# Altium PCB MainBoard_Model_Ra.PcbDoc
Units mil, origin at the board's own origin, x right, y up, seen from the top; angles counter-clockwise.
Board outline 3105 x 1505 mil, 2 copper layers (Top Layer, Bottom Layer); 45 components, 29 nets, 199 pads, 26 vias.
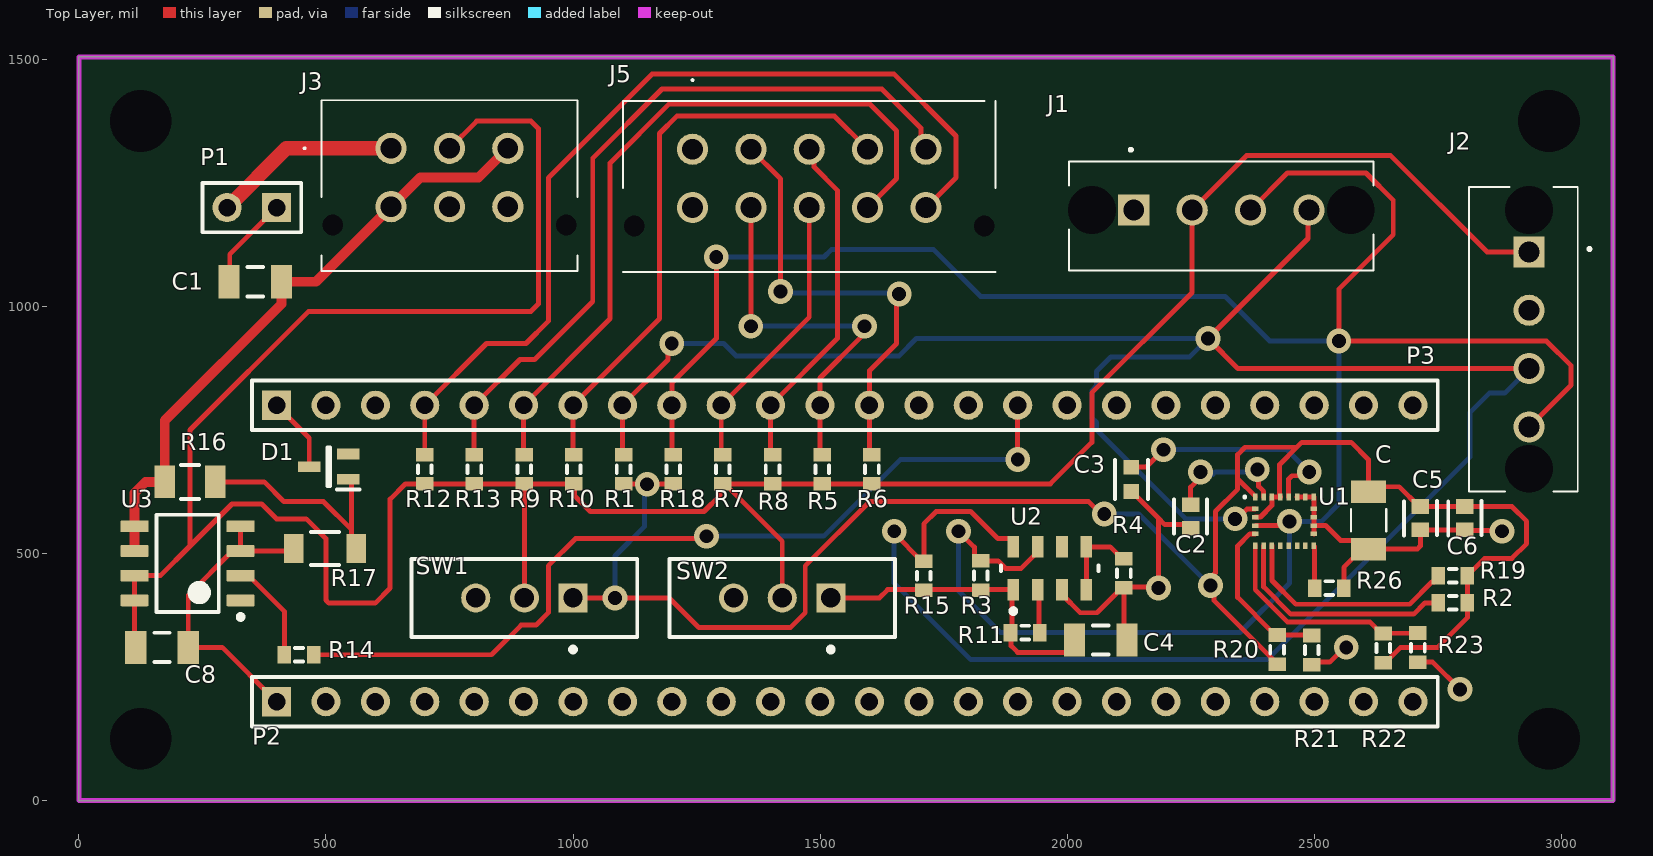
[diagram p0: Top Layer view]
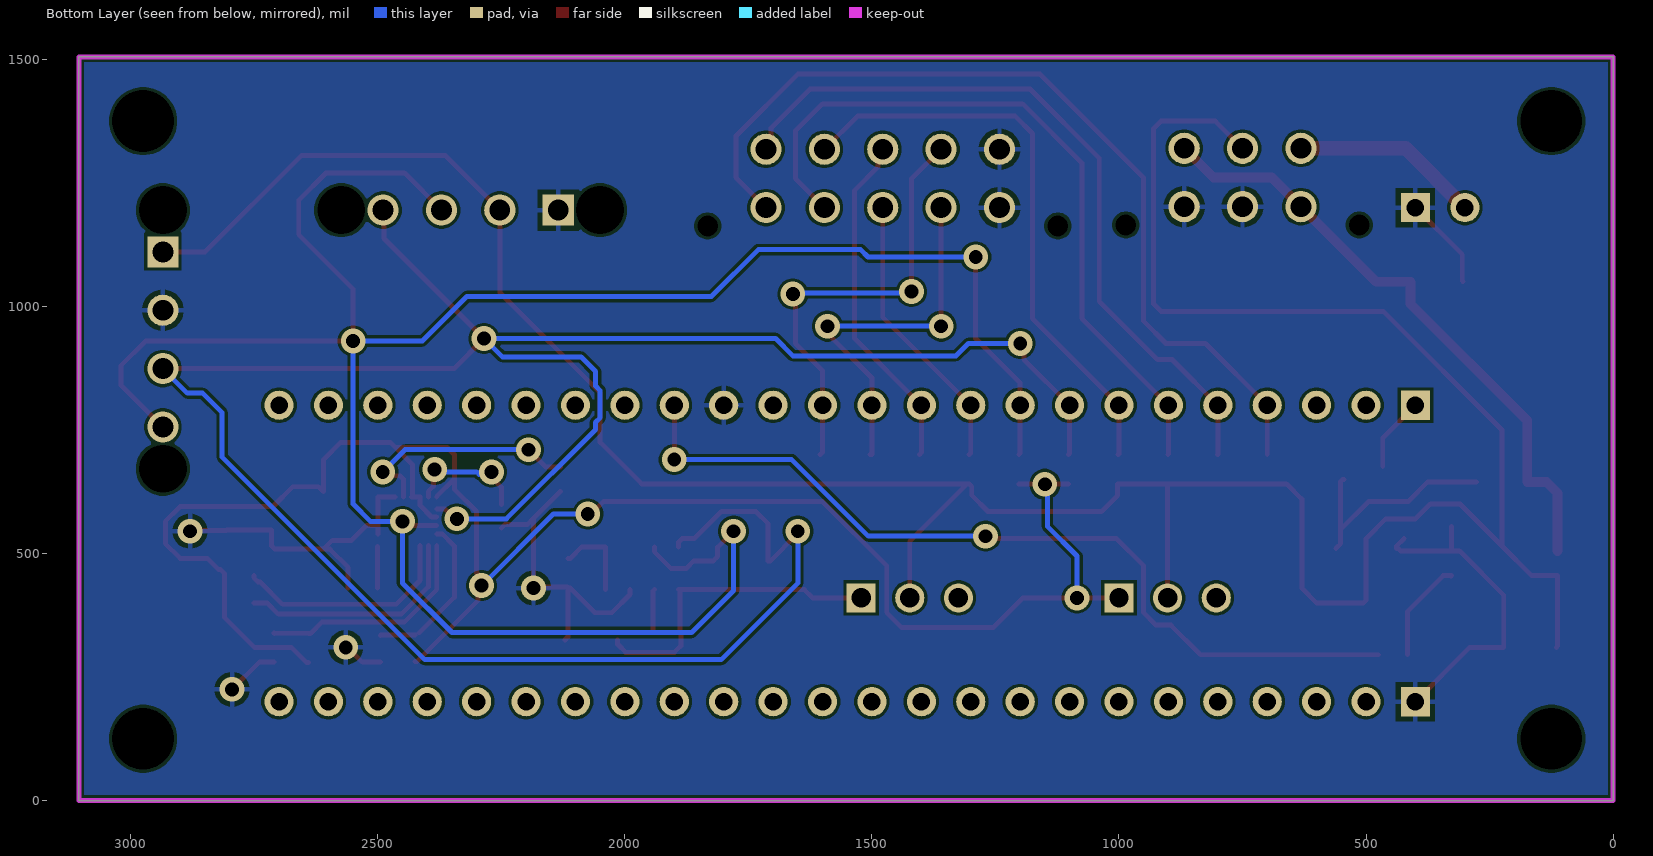
[diagram p1: Bottom Layer view, seen from below]

## Layer stack, top to bottom
Top Solder: solder mask 0.4, Solder Resist, Dk 3.5
Top Layer: signal copper 1.4
Dielectric 1: dielectric 12.6, FR-4, Dk 4.8
Bottom Layer: signal copper 1.4
Bottom Solder: solder mask 0.4, Solder Resist, Dk 3.5

## Board outline
0,0 3105,0 3105,1505 0,1505

## Design rules (kind name [scope] priority, off if disabled: settings)
Clearance [All] p1: gap=6 ignorepadtopadclearanceinfootprint=TRUE except(0: Arc-Hole Track-Hole SMDPad-Hole THPad-Hole Via-Hole Fill-Hole Poly-Hole Region-Hole Text-Hole; 10: Arc-Text Track-Text SMDPad-Text THPad-Text Via-Text Fill-Text Poly-Text Region-Text Text-Text)
PolygonConnect [All] p1: connectstyle=Relief reliefconductorwidth=10 reliefentries=4 polygonreliefangle="90 Angle" airgapwidth=10
RoutingVias [All] p1: holewidth=28 width=50 viastyle="Through Hole" minholewidth=28 minwidth=50 maxholewidth=28 maxwidth=50
SolderMaskExpansion [All] p1: expansion=4 istentingtop=FALSE
Width Vufil [InNet('Vufil')] p1: maxlimit=20 minlimit=15 preferedwidth=20
Width Vbat [InNet('Vbat')] p2: maxlimit=30 minlimit=20 preferedwidth=30
Width [All] p3: maxlimit=10 minlimit=10 preferedwidth=10
30 further rules are at their usual default settings.

## Components (designator, comment, footprint, x,y, rotation, side; value= is the part's Value field where it differs from the comment)
C "10uF" CAPC3216X110N 2610,566.93 r270 top
C1 "Cap Semi" C1206 356.85,1050 r0 top value=0.1uF
C2 "0.1uF" FP-C0603C-CF-MFG 2250,575 r270 top value="0.10 μF"
C3 "10nF" FP-CL10-IPC_C 2130,650 r270 top
C4 "Cap Semi" C1206 2068.15,325 r0 top value=0.1uF
C5 "0.1uF" FP-C0603C-CF-MFG 2715,571.38 r270 top value="0.10 μF"
C6 "0.1uF" FP-C0603C-CF-MFG 2805,571.38 r270 top value="0.10 μF"
C8 "Cap Semi" C1206 168.15,310 r180 top value=10uF
D1 "MMBD330T1G" SOT65P220X100-3N 505.63,675.59 r180 top
J1 "0436500418" 0436500418 2135,1195 r180 top
J2 "0436500418" 0436500418 2935,1110.35 r90 top
J3 "0430450614" 0430450614 631.89,1320 r180 top
J5 "0430451013" 0430451013 1241.89,1318.11 r180 top
P1 "Header 2" HDR1X2 400,1200 r180 top
P2 "Header 24" HDR1X24 400,200 r0 top
P3 "Header 24" HDR1X24 400,800 r0 top locked
R1 "Res3" J1-0603 1102.22,670.47 r270 top value=10K
R2 "Res3" J1-0603 2780.47,400 r180 top value=10K
R3 "Res3" J1-0603 1825,455.47 r270 top value=10K
R4 "Res3" J1-0603 2115,460 r90 top value=10K
R5 "Res3" J1-0603 1504.44,670.47 r270 top value=10K
R6 "Res3" J1-0603 1605,670.47 r270 top value=10K
R7 "Res3" J1-0603 1303.33,670.47 r270 top value=10K
R8 "Res3" J1-0603 1403.89,670.47 r270 top value=10K
R9 "Res3" J1-0603 901.11,670.47 r90 top value=10K
R10 "Res3" J1-0603 1001.67,670.47 r90 top value=10K
R11 "Res3" J1-0603 1915,340 r0 top value=10K
R12 "Res3" J1-0603 700,670.47 r90 top value=10K
R13 "Res3" J1-0603 800.56,670.47 r90 top value=10K
R14 "Res3" J1-0603 445.47,295 r180 top value=250K
R15 "Res3" J1-0603 1710,455 r90 top value=10K
R16 "1KR" FP-ESR18-IPC_C 225,645 r180 top
R17 "1.5KR" FP-RT1206-MFG 497.99,510 r180 top value=1.5KΩ
R18 "Res3" J1-0603 1202.78,670.47 r90 top value=10K
R19 "Res3" J1-0603 2780.47,455 r180 top value=10K
R20 "Res3" J1-0603 2425,305.47 r90 top value=10K
R21 "Res3" J1-0603 2495,304.53 r90 top value=10K
R22 "Res3" J1-0603 2640,308.58 r90 top value=10K
R23 "Res3" J1-0603 2710,309.53 r90 top value=10K
R26 "Res3" J1-0603 2530.47,430 r180 top value=10K
SW1 "EG1218" ESWI-EG1218_V 901.57,410 r180 top
SW2 "EG1218" ESWI-EG1218_V 1423.43,410 r180 top
U1 "LSM9DS1TR" STM-LGA-24_3500X3000X1000 2440,565 r0 top
U2 "MS561101BA03-50" MSI-MS561101BA03-50-8_V 1965,470 r90 top
U3 "TPS76633DR" D0008A_N 220,480 r180 top

## Footprints (in the part's own frame and the unit in brackets; to place one, negate y for a bottom-side part, rotate by r counter-clockwise, add the part's x,y. Pads: shape width x height; smd on the part's side, far side on the other; paste and mask are expansions set on the pad)
0430450614 [mm]
  round 1.605 hole 1.07: 1(0,0) 2(-3,0) 3(-6,0) 4(0,3) 5(-3,3) 6(-6,3)
  round 0.535 hole 1.07 unplated: MH1(3,3.94) MH2(-9,3.94)
  silkscreen extent -9.57,-2.47 4.5,6.3, body extent -9.57,-2.47 3.57,6.3, height 10.26
0430451013 [mm]
  round 1.605 hole 1.07: 1(0,0) 2(-3,0) 3(-6,0) 4(-9,0) 5(-12,0) 6(0,3) 7(-3,3) 8(-6,3) 9(-9,3) 10(-12,3)
  round 0.535 hole 1.07 unplated: MH1(-15,3.94) MH2(3,3.94)
  silkscreen extent -15.58,-3.6 3.57,6.3, body extent -15.58,-2.47 3.57,6.3, height 10.26
0436500418 [mm]
  rect 1.605x1.605 hole 1.07: 1(0,0)
  round 1.605 hole 1.07: 2(-3,0) 3(-6,0) 4(-9,0)
  round 1.23 hole 2.46 unplated: 5(2.15,0) 6(-11.15,0)
  silkscreen extent -12.32,-3.15 3.32,3.1, body extent -12.32,-2.47 3.32,3.1, height 10
C1206 [mm] "Chip Capacitor, Body 3.2x1.6mm, IPC High Density"
  rect 1.1x1.7 smd: 1(-1.35,0) 2(1.35,0)
  silkscreen extent -0.4,-0.75 0.4,0.75, body extent -1.7,-0.9 1.7,0.9, height 1.3
CAPC3216X110N [mm]
  rect 1.16x1.82 smd: 1(-1.475,0) 2(1.475,0)
  silkscreen extent -0.57,-0.9 0.57,0.9
D0008A_N [mm] "SOIC, 8-Leads, Body 5x4mm, Pitch 1.27mm, IPC Medium Density"
  rrect17% 1.45x0.6 smd: 1(-2.725,1.905) 2(-2.725,0.635) 3(-2.725,-0.635) 4(-2.725,-1.905) 5(2.725,-1.905) 6(2.725,-0.635) 7(2.725,0.635) 8(2.725,1.905)
  silkscreen extent -2.85,-2.5 1.6,2.88, body extent -3,-2.45 3,2.45, height 1.63
ESWI-EG1218_V [mm] "THD, 3-Leads, Body 11.6x4mm, Pitch 2.5mm"
  rect 1.5x1.5 hole 1: 1(-2.5,0)
  round 1.5 hole 1: 2(0,0) 3(2.5,0)
  silkscreen extent -5.8,-2 5.8,2.77, body extent -5.8,-2 5.8,2, height 7.4
FP-C0603C-CF-MFG [mm]
  rect 0.75x0.9 smd paste+0 mask+0: 1(-0.6,0) 2(0.6,0)
  silkscreen extent -0.87,-0.85 0.88,0.85, body extent -1.2,-0.6 1.2,0.6, height 0.25
FP-CL10-IPC_C [mil]
  rect 29.85x31.97 smd paste+0 mask+0: 1(-24.68,0) 2(24.68,0)
  silkscreen extent -40,-33 40,33, body extent -44,-22 44,22, height 10
FP-ESR18-IPC_C [mil]
  rect 41.56x65.28 smd paste+0 mask+0: 1(-51.23,0) 2(51.23,0)
  silkscreen extent -19,-34 19,34, body extent -76,-38 76,38, height 10
FP-RT1206-MFG [mm]
  rect 1x1.5 smd paste+0 mask+0: 1(-1.6,0) 2(1.6,0)
  silkscreen extent -0.72,-0.85 0.72,0.85, body extent -2.2,-0.95 2.2,0.95, height 0.25
HDR1X2 [mm] "Connector; Header; 2 Position"
  rect 1.5x1.5 hole 0.9: 1(0,0)
  round 1.5 hole 0.9: 2(2.54,0)
  silkscreen extent -1.27,-1.27 3.81,1.27
HDR1X24 [mm] "Connector; Header; 24 Position"
  rect 1.5x1.5 hole 0.9: 1(0,0)
  round 1.5 hole 0.9: 2(2.54,0) 3(5.08,0) 4(7.62,0) 5(10.16,0) 6(12.7,0) 7(15.24,0) 8(17.78,0) 9(20.32,0) 10(22.86,0) 11(25.4,0) 12(27.94,0) 13(30.48,0) 14(33.02,0) 15(35.56,0) 16(38.1,0) 17(40.64,0) 18(43.18,0) 19(45.72,0) 20(48.26,0) 21(50.8,0) 22(53.34,0) 23(55.88,0) 24(58.42,0)
  silkscreen extent -1.27,-1.27 59.69,1.27
J1-0603 [mm] "Chip Resistor, Body 1.6x0.8mm, IPC High Density"
  rect 0.7x0.9 smd: 1(-0.75,0) 2(0.75,0)
  silkscreen extent -0.2,-0.35 0.2,0.35, body extent -0.85,-0.48 0.85,0.48, height 0.9
MSI-MS561101BA03-50-8_V [mm] "SMD, 8-Leads, Body 5x3mm, Pitch 1.25mm"
  rect 1.1x0.6 smd: 1(-1.1,1.875) 2(-1.1,0.625) 3(-1.1,-0.625) 4(-1.1,-1.875) 5(1.1,-1.875) 6(1.1,-0.625) 7(1.1,0.625) 8(1.1,1.875)
  silkscreen extent -2.32,-2.5 0.15,2.5, body extent -1.5,-2.5 1.5,2.5, height 1
SOT65P220X100-3N [mm]
  rect 1.15x0.55 smd: 1(-1,0.65) 2(-1,-0.65) 3(1,0)
  silkscreen extent -1.58,-1 0.08,1.17, body extent -1.1,-1 1.1,1, height 1
STM-LGA-24_3500X3000X1000 [mm] "LGA, 24-Leads, Body 3.65x3.15mm, Pitch 0.43mm"
  rect 0.23x0.35 smd mask+0.05: 1(-1.505,1.25) 6(-1.505,-1.25) 7(-1.075,-1.25) 8(-0.645,-1.25) 9(-0.215,-1.25) 10(0.215,-1.25) 11(0.645,-1.25) 12(1.075,-1.25) 13(1.505,-1.25) 18(1.505,1.25) 19(1.075,1.25) 20(0.645,1.25) 21(0.215,1.25) 22(-0.215,1.25) 23(-0.645,1.25) 24(-1.075,1.25)
  rect 0.35x0.23 smd mask+0.05: 2(-1.505,0.645) 3(-1.505,0.215) 4(-1.505,-0.215) 5(-1.505,-0.645) 14(1.505,-0.645) 15(1.505,-0.215) 16(1.505,0.215) 17(1.505,0.645)
  silkscreen extent -2.11,1.19 -1.98,1.31, body extent -1.82,-1.57 1.83,1.58, height 1.03

## Part data
C: library part C1206C106K4PACTU, "10ÂµF Â±10% 16V Ceramic Capacitor X5R 1206 _3216 Metric_", Package="1206 KEMET", Digi-Key_Part_Number=399-5091-1-ND, Digi-Key_Purchase_URL=https://www.digikey.com/product-detail/en/kemet/C1206C106K4PACTU/399-5091-1-ND/1465625?utm_source=snapeda&utm_medium=aggregator&utm_campaign=symbol, MF=KEMET, MP=C1206C106K4PACTU, SnapEDA_Link=https://www.snapeda.com/parts/C1206C106K4PACTU/KEMET/view-part/609620/?ref=snap
C1 C4 C8: "Capacitor (Semiconductor SIM Model)", LatestRevisionDate=29-May-2009, LatestRevisionNote="IPC-7351 Footprint Added.", PackageDescription="Chip Capacitor", PackageReference=C1206, Published=8-Jun-2000, Publisher="Altium Limited"
C2 C5 C6: library part CMP-2006-03068-2, "CAP CER 0.1UF 50V 20% X7R 0603", Capacitance="0.10 μF", Manufacturer=KEMET, Manufacturer Part Number=C0603C104M5RACTU, Package=C0603C-CF, Temperature="-55°C to +125°C", Temperature Characteristic=X7R, Temperature Coefficient=30ppm/°C, Temperature Range High=+125°C, Temperature Range Low=-55°C, Tolerance=0.2, Voltage Rating="50 V", Automotive=Yes, Automotive Grade="Grade 1", Category=Cap, ComponentLink2Description=Datasheet, ComponentLink2URL=https://api.kemet.com/component-edge/download/datasheet/C0603C100J5GACAUTO.pdf, Device Class L1="Passive Components", Device Class L2=Capacitors, Device Class L3="Ceramic Capacitors", Digikey Description="CAP CER 0.1UF 50V 20% X7R 0603", Height=0.87mm, Lead Free=Yes, Material=Ceramic, Mouser Description="Multilayer Ceramic Capacitors MLCC - SMD/SMT 50volts 0.1uF X7R 20%", Octopart=https://octopart.com/c0603c104m5ractu-kemet-11855687, RoHS=TRUE
C3: library part CMP-13271-000724-1, "Cap Ceramic 10nF 25V X7R ±10% Pad SMD 0603 +125°C T/R", Case Code (Imperial)=0603, Case Code (Metric)=1608, Max Operating Temperature=125°C, Min Operating Temperature=-55°C, Ratings=AEC-Q200, Tolerance=10%, Voltage Rating=25V, Capacitance=10nF, Case/Package=0603, Features="Soft Termination", Length=0.063inch, Mount="Surface Mount", Packaging="Tape and Reel", Thickness=0.035inch, Width=0.031inch
D1: "Diode", Manufacturer_Name="ON Semiconductor", Mouser Part Number=863-MMBD330T1G, Arrow Part Number=MMBD330T1G, Arrow Price/Stock=https://www.arrow.com/en/products/mmbd330t1g/on-semiconductor, Datasheet Link=http://www.onsemi.com/pub/Collateral/MMBD330T1-D.PDF, Height=1mm, Manufacturer_Part_Number=MMBD330T1G, Mouser Price/Stock=https://www.mouser.com/Search/Refine.aspx?Keyword=863-MMBD330T1G
J1 J2 J3: "Connector", Manufacturer_Name=Molex
  J1 J2: Arrow Part Number=0436500418, Arrow Price/Stock=https://www.arrow.com/en/products/0436500418/molex, Datasheet Link=https://www.molex.com/pdm_docs/sd/436500418_sd.pdf, Height=9.9mm, Manufacturer_Part_Number=0436500418
  J3: Arrow Part Number=0430450614, Arrow Price/Stock=https://www.arrow.com/en/products/0430450614/molex, Datasheet Link=https://www.molex.com/pdm_docs/sd/430450614_sd.pdf, Height=10.16mm, Manufacturer_Part_Number=0430450614
J5: "Connector", Manufacturer_Name=Molex, Mouser Part Number=N/A, Datasheet Link=https://media.digikey.com/pdf/Data%20Sheets/Molex%20PDFs/PK-70873-05xx_1_N3.pdf, Height=10.16mm, Manufacturer_Part_Number=0430451013, Mouser Price/Stock=https://www.mouser.co.uk/ProductDetail/Molex/0430451013?qs=PBcRNPEHKsr61YxZQctt5w%3D%3D
P1: "Header, 2-Pin", LatestRevisionDate=17-Jul-2002, LatestRevisionNote="Re-released for DXP Platform.", Publisher="Altium Limited"
P2 P3: "Header, 24-Pin", LatestRevisionDate=17-Jul-2002, LatestRevisionNote="Re-released for DXP Platform.", Publisher="Altium Limited"
R1 R2 R3 R4 R5 R6 R7 R8 R9 R10 R11 R12 R13 R14 R15 R18 R19 R20 R21 R22 R23 R26: "Resistor", LatestRevisionDate=29-May-2009, LatestRevisionNote="IPC-7351 Footprint Added.", PackageDescription="Chip Resistor", PackageReference=J1-0603, Published=8-Jun-2000, Publisher="Altium Limited"
R16: library part CMP-08839-005364-1, "1kΩ ±1% 0.5W 1206 Anti-Surge Chip Resistor AEC-Q200", Case Code (Imperial)=1206, Case Code (Metric)=3216, Max Operating Temperature=155°C, Max Power Dissipation=333mW, Min Operating Temperature=-55°C, Package Quantity=1, Resistance=1kR, Resistor Type="Thick Film", Temperature Coefficient=100ppm/°C, Tolerance=1%, Case/Package=1206, Features="Automotive AEC-Q200", Height=0.026inch, Length=0.126inch, Number of Terminations=2, Packaging="Tape and Reel", RoHS Compliant=Yes, Series=ESR, Width=0.063inch
R17: library part CMP-2003-04305-2, "RES SMD 1.5K OHM 1% 1/4W 1206", Manufacturer=Yageo, Manufacturer Part Number=RT1206FRE071K5L, Package=RT1206, Power Rating=0.25W, Resistance=1.5KΩ, Temperature="-55°C to +155°C", Temperature Coefficient="50 ppm/°C", Temperature Range High=+155°C, Temperature Range Low=-55°C, Tolerance=0.0002, Voltage Rating=200V, Automotive=No, Category=Res, ComponentLink2Description=Datasheet, ComponentLink2URL=http://www.yageo.com/documents/recent/PYu-RT_1-to-0.01_RoHS_L_9.pdf, Composition="Thin Film", Device Class L1="Passive Components", Device Class L2=Resistors, Device Class L3="Chip SMD Resistors", Digikey Description="RES SMD 1.5K OHM 1% 1/4W 1206", Footprint Url=http://www.yageo.com/exep/pages/download/literatures/PYu-R_Mount_10.pdf, Height=0.65mm, Ipc Land Pattern Name=RESC310160X55, Lead Free=Yes, Mouser Description="High Precision-High Stability Chip Resistor Thin Film 1206 1.5kOhm 1% Paper T/R", Octopart=https://octopart.com/rt1206fre071k5l-yageo-1240277, RoHS=TRUE, Series=RT
SW1 SW2: library part CMP-1696-00002-1, "Slide Switch, 500 V, -20 to 70 degC, 3-Pin THD, RoHS", Case\Package=SOT-23-5, Dropout Voltage="300 mV", Max Input Voltage="8 V", Max Operating Temperature="85 degC", Max Ouput Current="150 mA", Max Power Dissipation="250 mW", Min Input Voltage="4.3 V", Min Operating Temperature="-40 degC", Nominal Output Voltage="3.3 V", Package Quantity=3000, ComponentLink1Description="Manufacturer URL", ComponentLink1URL=http://www.e-switch.ch/en/, ComponentLink2Description=Datasheet, ComponentLink2URL=https://www.e-switch.com/system/asset/product_line/data_sheet/119/EG.pdf, DatasheetVersion=Oct-15, Height="1.3 mm", Length="3 mm", Mount="Surface Mount", Output Current="150 mA", Output Voltage="3.3 V", Outputs=1, PackageDescription="3-Pin Through Hole Device, Body 11.6 x 4 mm, Pitch 2.5 mm", PackageReference=EG1218, Packaging="Tape and Reel", Pins=5, Power Rating="250 mW", Radiation Hardening=No, REACH SVHC="No SVHC", RoHSCompliant=true, Width="1.8 mm"
U1: library part CMP-2000-06606-1, "iNEMO Inertial Module: 3D Accelerometer, 3D Gyroscope, 3D Magnetometer, 1.9 to 3.6 V, -40 to 85 degC, 24-Pin LGA, RoHS, Tape and Reel", Manufacturer=STMicroelectronics, Package Description="24-Pin Plastic Land Grid Array Package, Body 3.65 x 3.15 mm, Pitch 0.43 mm", Package Reference=LGA-24_3500X3000X1000, PartNumber=LSM9DS1, Sensor Case Style=LGA, Supply Voltage Max=3.6V, Supply Voltage Min=1.9V, Acceleration Range=±2g,±4g,±8g,±16g, Datasheet URL=http://www2.st.com/content/ccc/resource/technical/document/datasheet/1e/3f/2a/d6/25/eb/48/46/DM00103319.pdf/files/DM00103319.pdf/jcr:content/translations/en.DM00103319.pdf, Datasheet Version="Rev. 3, 03/2015", Gyroscope Range=±245°/s,±500°/s,±2000°/s, Manufacturer URL=http://www.st.com/, MEMS Module Function=Tri-AxisGyroscope,Tri-AxisAccelerometer,Tri-AxisMagnetometer, Mounting Technology=SurfaceMount, MSL=MSL3-168hours, No. of Pins=24Pins, Packaging=CutTape, Product Range=-, SVHC=NoSVHC(17-Dec-2015)
U2: library part CMP-2000-05251-1, "Barometric Pressure Sensor, with Stainless Steel Cap, 1.8 to 3.6 V, -45 to 85 degC, 8-Pin QFN, RoHS, Tape and Reel", Manufacturer="Measurement Specialties", Operating Pressure Max=1200mbar, Operating Pressure Min=10mbar, Operating Temperature Max=85degC, Operating Temperature Min=-40degC, Package Description="8-Pin Surface Mount Device, Body 5 x 3 mm, Pitch 1.25 mm", Package Reference=MS561101BA03-50-8, Sensor Case Style=QFN, Supply Current=12.5µA, Supply Voltage Max=3.6V, Supply Voltage Min=1.8V, Connection Size=0.5mm, Datasheet URL=http://www.te.com/commerce/DocumentDelivery/DDEController?Action=srchrtrv&DocNm=MS5611-01BA03&DocType=Data+Sheet&DocLang=English&DocFormat=pdf&PartCntxt=CAT-BLPS0036, Datasheet Version=Sep-15, Manufacturer URL=http://www.meas-spec.com/, No. of Pins=8, Pressure Type=Barometric, SVHC=NoSVHC(20-Jun-2013)
U3: library part CMP-0394-00013-2, "Single Output LDO, 250 mA, Fixed 3.3 V Output, 2.7 to 10 V Input, with Low IQ, 8-pin SOIC (D), -40 to 125 degC, Green (RoHS & no Sb/Br)", Manufacturer="Texas Instruments", Power Good=TRUE, Code_JEDEC=MS-012, ComponentLink1Description="Manufacturer URL", ComponentLink1URL=http://www.ti.com/, ComponentLink2Description=Datasheet, ComponentLink2URL=http://www.ti.com/general/docs/lit/getliterature.tsp?genericPartNumber=TPS76633&fileType=pdf, ComponentLink3Description="Package Specification", ComponentLink3URL=http://www.ti.com/litv/pdf/msoi002j, DatasheetVersion=SLVS237C, Eco-Plan="Green (RoHS & no Sb/Br)", Fixed Output Options(V)=3.3, Iout(Max)(A)=0.25, Iq(Typ)(mA)=0.03, Mounting Technology="Surface Mount", PackageDescription="8-Pin Plastic Small Outline, Body 4.9 x 3.9 mm, Pitch 1.27 mm", PackageReference=D0008A, PackageVersion=4040047-3/M, PartNumber=TPS76633DR, SubFamily="Single Channel LDO", Vdo(Typ)(mV)=230, Vin(Max)(V)=10, Vin(Min)(V)=2.7, Vout Adj(Max)(V)=3.3, Vout Adj(Min)(V)=3.3

## Free pads (board coordinates)
  round 60 hole 125: ""(125,125) ""(125,1375) ""(2975,125) ""(2975,1375)

## Via types
v1: diameter 50, hole 28, Top Layer to Bottom Layer, 26 vias

## Nets (pads, with @x,y where several pads share a name; then routed paths per layer and width w, separated by ;. In a path a pad name is that pad's centre, name@x,y a point inside that pad or via, vN(x,y) a via of type N, cw(c..) or ccw(c..) an arc to the next point about the centre after c; other vN are vias at no path point)
A0: J5.2 P3.13 R6.1 | length 907
  Top Layer w10: J5.2 1420,1258.11 v1(1420,1030) ; R6.1 1600,705 P3.13 1600,870 1655,925 1655,1020 v1(1660,1025)
  Bottom Layer w10: v1(1420,1030) 1422.5,1027.5 1657.5,1027.5 v1(1660,1025)
A1: J5.7 P3.12 R5.1 | length 771.7
  Top Layer w10: v1(1360,960) J5.7 ; R5.1 1500,700 1500,855 1582.35,937.35 1582.35,952.35 v1(1590,960)
  Bottom Layer w10: v1(1360,960) v1(1590,960)
A2: J5.3 P3.11 R8.1 | length 699.2
  Top Layer w10: R8.1 1400,703.89 P3.11 1535,935 1535,1235 1487.95,1282.05 1487.95,1308.27 J5.3
A3: J5.8 P3.10 R7.1 | length 575.2
  Top Layer w10: R7.1 1300,703.33 P3.10 1478.11,978.11 J5.8
A6: J5.4 P3.7 R10.2 | length 1186.6
  Top Layer w10: R10.2 1000,701.67 P3.7 1175,975 1175,1350 1210,1385 1529.33,1385 J5.4
A7: J5.9 P3.6 R9.2 | length 1498.4
  Top Layer w10: R9.2 900,701.11 P3.6 1075,975 1075,1290 1195,1410 1600,1410 1655,1355 1655,1258.78 1602.44,1206.22 1596.22,1206.22 J5.9
A8: J5.5 P3.5 R13.2 | length 1519.1
  Top Layer w10: R13.2 800,700.56 P3.5 892.59,892.59 922.59,892.59 1040,1010 1040,1300 1180,1440 1625,1440 1704.15,1360.85 1704.15,1328.29 J5.5
A9: J5.10 P3.4 R12.2 | length 1844.3
  Top Layer w10: R12.2 P3.4 825,925 905,925 950,970 950,1260 1160,1470 1650,1470 1775,1345 1775,1260.67 J5.10
CS_A/G: R2.2 U1.7 | length 468.9
  Top Layer w10: U1.7 2397.68,432.32 2452.72,377.28 2701.51,377.28 2724.23,400 R2.2
CS_M: R19.2 U1.8 | length 452.9
  Top Layer w10: U1.8 2414.61,445.39 2462.72,397.28 2693.23,397.28 2738.23,442.28 2742.17,442.28 2750.94,451.06 R19.2
GND: C1.1 C2.2 C3.2 C4.2 C5.2 C6.2 C8.1 C.2 J1.1 J2.2 J3.5 J3.6 J5.1 J5.6 P1.1 P2.1 P3.15 R4.1 R17.2 R21.1 R23.1 R26.1 U1.14 U1.15 U1.16 U1.17 U1.18 U1.19 U1.20 U2.3 U3.3 U3.4 | length 2334.4
  Top Layer w10: C1.1 305.35,1051.65 305.35,1105.35 P1.1 ; U3.4 U3.3 ; P2.1 290,310 C8.1 221.3,415.75 310.55,505 U3.3 ; R17.2@423.31,530 437.99,515.31 R17.2@437.99,510 ; R17.2 430,505 U3.3 ; U2.3 1989.61,416.85 2026.46,380 2060.59,380 2111.06,430.47 R4.1 ; C4.2 2115,331.3 R4.1 ; C3.2 2131.06,625.32 2184.69,571.69 ; v1@2184.69,430.31 2184.69,571.69 ; v1(2185,430) 2183.14,431.86 2116.39,431.86 R4.1 ; C2.2 2242.96,558.42 2197.96,558.42 2184.69,571.69 ; U1.20 U1.19 U1.18 U1.17 U1.16 U1.15 ; R21.1@2495,280 2531.35,280 2561.35,310 v1(2565,310) ; U1.14 U1.15 ; R26.1 2560,471.85 2597.01,508.86 C.2 ; R23.1 2740,280 v1(2795,225) ; v1(2880,545) 2878.62,546.38 2806.38,546.38 C6.2 C5.2 2715,515 2708.86,508.86 C.2 ; U1.15 2523.46,556.54 2553.31,526.69 2592.17,526.69 C.2
IMUnc: R26.2 U1.13 | length 84.1
  Top Layer w10: R26.2 U1.13@2500.94,514.09
NetC2_1: C2.1 U1.24 | length 229.8
  Top Layer w10: C2.1 2250,634.18 2270,654.18 v1(2270,665) ; v1(2385,670) 2387.53,667.47 2387.53,635.96 2397.68,625.82 U1.24
  Bottom Layer w10: 2295,660 2300,665 2380,665 v1(2385,670)
NetC3_1: C3.1 U1.21 | length 477.2
  Top Layer w10: C3.1 2159.68,674.68 v1(2195,710) ; U1.21 2448.46,650.65 2455.16,657.35 2482.35,657.35 v1(2490,665)
  Bottom Layer w10: v1(2195,710) 2445,710 v1(2490,665)
NetD1_1: D1.1 R16.1 R17.1 | length 462.5
  Top Layer w10: R16.1 375,645 415,605 495,605 551.33,548.67 ; D1.1 546.57,650 551.33,645.24 551.33,548.67 ; R17.1 551.33,519.65 551.33,548.67
NetR4_2: R4.2 U2.4 U2.5 | length 172.6
  Top Layer w10: U2.4 U2.5 2087.28,513.31 2111.06,489.53 R4.2
NetR11_2: R11.2 U2.2 | length 88.6
  Top Layer w10: U2.2 1942.7,424.39 1942.7,342.3 R11.2@1945,340
NetR14_2: R14.2 U3.2 | length 207.2
  Top Layer w10: U3.2@327.76,454.53 U3.2 344.02,455 415.94,383.07 R14.2
PWR_OK: P3.16 R14.1 | length 1754.3
  Top Layer w10: R14.1 835,295 895,355 925,355 950,380 950,475 1005,530 1265,530 v1(1270,535) ; v1(1900,690) P3.16
  Bottom Layer w10: v1(1270,535) 1507.5,535 1662.5,690 v1(1900,690)
SCL0: J1.4 J2.3 P3.8 R1.1 R15.2 U1.2 U2.8 | length 5321.6
  Top Layer w10: R1.1 1100,702.22 P3.8 1192.35,892.35 1192.35,917.35 v1(1200,925) ; v1(1650,545) 1650,540.59 1706.06,484.53 R15.2 1710,560 1735,585 1805,585 1860.04,529.96 1884.37,529.96 1891.18,523.15 U2.8 ; v1(2340,570) 2343.94,570 2364.34,590.39 U1.2 ; J1.4 2487.58,1193.25 2487.58,1137.58 v1(2285,935) 2345.87,874.13 J2.3
  Bottom Layer w10: v1(1200,925) 1305,925 1330,900 1660,900 1695,935 v1(2285,935) 2247.98,897.98 2088.84,897.98 2059.47,868.61 2059.47,839.09 2050,829.62 2050,799.55 2050,775 2059.47,765.53 2059.47,750.53 2240,570 v1(2340,570) ; v1(1650,545) 1650,440 1805,285 2405,285 2815,695 2815,785 2854.48,824.48 2885.34,824.48 J2.3
SDA0: J1.3 J2.4 P3.9 R3.1 R18.2 U1.4 U2.7 | length 4850.5
  Top Layer w10: R18.2 1200,702.78 1200,845 1290,935 v1(1290,1100) ; v1(1780,545) 1812.28,512.72 1812.28,493.78 1821.06,485 R3.1 1860.43,485 1875.43,470 1906.93,470 1940.39,503.46 U2.7 ; J1.3 2409.44,1233.22 2409.44,1233.58 2445.86,1270 2605,1270 2660,1215 2660,1145 2550,1035 v1(2550,930) 2970,930 3020,880 3020,841.02 J2.4 ; U1.4 2430.71,556.54 2439.18,565 v1(2450,565)
  Bottom Layer w10: v1(1290,1100) 1507.91,1100 1522.91,1115 1730,1115 1825,1020 2320,1020 2410,930 v1(2550,930) 2550,600 2515,565 v1(2450,565) 2450,440 2350,340 1865,340 1780,425 v1(1780,545) ; J2.4@2927.38,748.41 J2.4
SDO_A/G: R20.2 R21.2 U1.5 | length 321.4
  Top Layer w10: U1.5 2369.61,539.61 2345,515 2345,411.06 R20.2@2416.54,339.53 ; R20.2 2494.06,335 R21.2
SDO_M: R22.2 R23.2 U1.6 | length 456.1
  Top Layer w10: U1.6 2380.75,426.62 2446.34,361.03 2613.14,361.03 2636.06,338.11 R22.2 2640.47,338.58 2707.92,338.58 2708.72,337.78 R23.2
Vbaro: C4.1 R3.2 R11.1 R15.1 SW2.1 U2.1 | length 645.3
  Top Layer w10: SW2.1 1620,410 1636.69,426.69 1700,426.69 1725,426.69 1800,426.69 1830,426.69 1865,426.69 U2.1 1888.33,423.84 1888.33,338.44 R11.1@1885.94,336.06 ; R11.1 1886.86,338.61 1886.86,313.14 1900,300 1998.35,300 2015,316.65 C4.1
Vbat: J3.1 P1.2 | length 381.6
  Top Layer w30: P1.2 420,1320 J3.1
VCC: C8.2 J1.2 J2.1 J3.2 R5.2 R6.2 R7.2 R8.2 R9.1 R10.1 R12.1 R13.1 SW1.2 SW2.2 U3.7 U3.8 | length 6092.4
  Top Layer w10: C8.2 112.72,312.28 U3.8 U3.7 165,455 225,515 ; J3.2 805,1375 915,1375 930,1360 930,1005 915,990 465,990 225,750 225,515 ; SW1.2 901.57,640.48 R9.1 ; SW2.2 1423.43,524.79 R7.2@1307.27,640.94 ; J2.1 2849.65,1110.35 2655,1305 2363.11,1305 J1.2 2253.11,1028.11 2050,825 2050,725 1965.94,640.94 R6.2 R5.2 R8.2 R7.2@1307.27,640.94 ; 225,515 310,600 370,600 400,570 460,570 500,530 500,405.32 505.86,399.46 599.46,399.46 630,430 630,610 660.94,640.94 R12.1 R13.1 R9.1 ; R9.1 R10.1 1002.94,640.94 1002.94,617.06 1035,585 1265,585 1298.02,618.02 1298.02,635.64 R7.2 R7.2@1307.27,640.94
Vimu: C5.1 C6.1 C.1 R1.2 R2.1 R18.1 R19.1 R20.1 R22.1 SW1.1 U1.1 U1.3 U1.22 U1.23 | length 3842.8
  Top Layer w10: SW1.1 v1(1085,410) 1195,410 1255,350 1440,350 1470,380 1470,475 1600,605 2043.43,605 2068.43,580 v1(2075,580) ; R1.2 1102.69,640.47 1149.53,640.47 v1(1150,640) 1150.47,640.47 1202.31,640.47 R18.1 ; U1.3 2381.22,573.94 2391.27,573.94 2414.61,597.28 U1.23 2415.08,614.69 2427.9,614.69 U1.22@2428.61,615.4 ; U1.1 2380.75,615.63 2345.69,650.69 2345,650 ; R20.1@2425,280.94 2421.06,280.94 2297.65,404.35 2297.65,427.35 v1(2290,435) 2297.65,442.65 2297.65,458.51 2300,460.86 2300,585 2345,630 2345,650 ; U1.22 2430,615.75 2430,680 2465,715 ; R22.1 2643.94,279.06 2674.88,310 2750,310 2810,370 R2.1 R19.1 2810,458.94 2818.78,467.72 2822.72,467.72 2845,490 2900,490 2930,520 2930,565 2900,595 C6.1 C5.1 2712.05,595 2672.05,635 2620,635 C.1 2610,690 2575,725 2475,725 2465,715 ; 2345,650 2345,700 2360,715 2465,715
  Bottom Layer w10: v1(1085,410) 1085,495 1145,555 1145,635 v1(1150,640) ; v1(2075,580) 2145,580 v1(2290,435)
Vteensy: D1.3 P3.1 | length 151.9
  Top Layer w10: P3.1 466.26,733.74 D1.3
Vufil: C1.2 J3.3 J3.4 R16.2 U3.5 U3.6 | length 1261
  Top Layer w10: J3.3@867.66,1319.55 867.66,1319.89 867.76,1320 J3.3
  Top Layer w20: U3.6 112.72,622.72 135,645 R16.2 173.77,768.77 410,1005 C1.2 480,1050 690.94,1260.94 809.06,1260.94 J3.3@867.66,1319.55
pads on no net: D1.2 J1.5 J1.6 J2.5 J2.6 J3.MH1 J3.MH2 J5.MH1 J5.MH2 P2.2 P2.3 P2.4 P2.5 P2.6 P2.7 P2.8 P2.9 P2.10 P2.11 P2.12 P2.13 P2.14 P2.15 P2.16 P2.17 P2.18 P2.19 P2.20 P2.21 P2.22 P2.23 P2.24 P3.2 P3.3 P3.14 P3.17 P3.18 P3.19 P3.20 P3.21 P3.22 P3.23 P3.24 SW1.3 SW2.3 U1.9 U1.10 U1.11 U1.12 U2.6 U3.1

## Polygon pours and split planes (outlines as drawn)
GND on Bottom Layer "GND_L02_P000" (solid, pour order 0): 0,1505 0,0 3105,0 3105,1505

## Keep-outs
Keep-Out Layer:
  the board outline again, w10